# Altium PCB PCB1.PcbDoc
Units mm, origin at the board's own origin, x right, y up, seen from the top; angles counter-clockwise.
Board outline 137.5 x 101.6 mm, 2 copper layers (Top Layer, Bottom Layer); 20 components, 36 nets, 109 pads, 0 vias.
Unrouted connection lines stored in the file: 53.
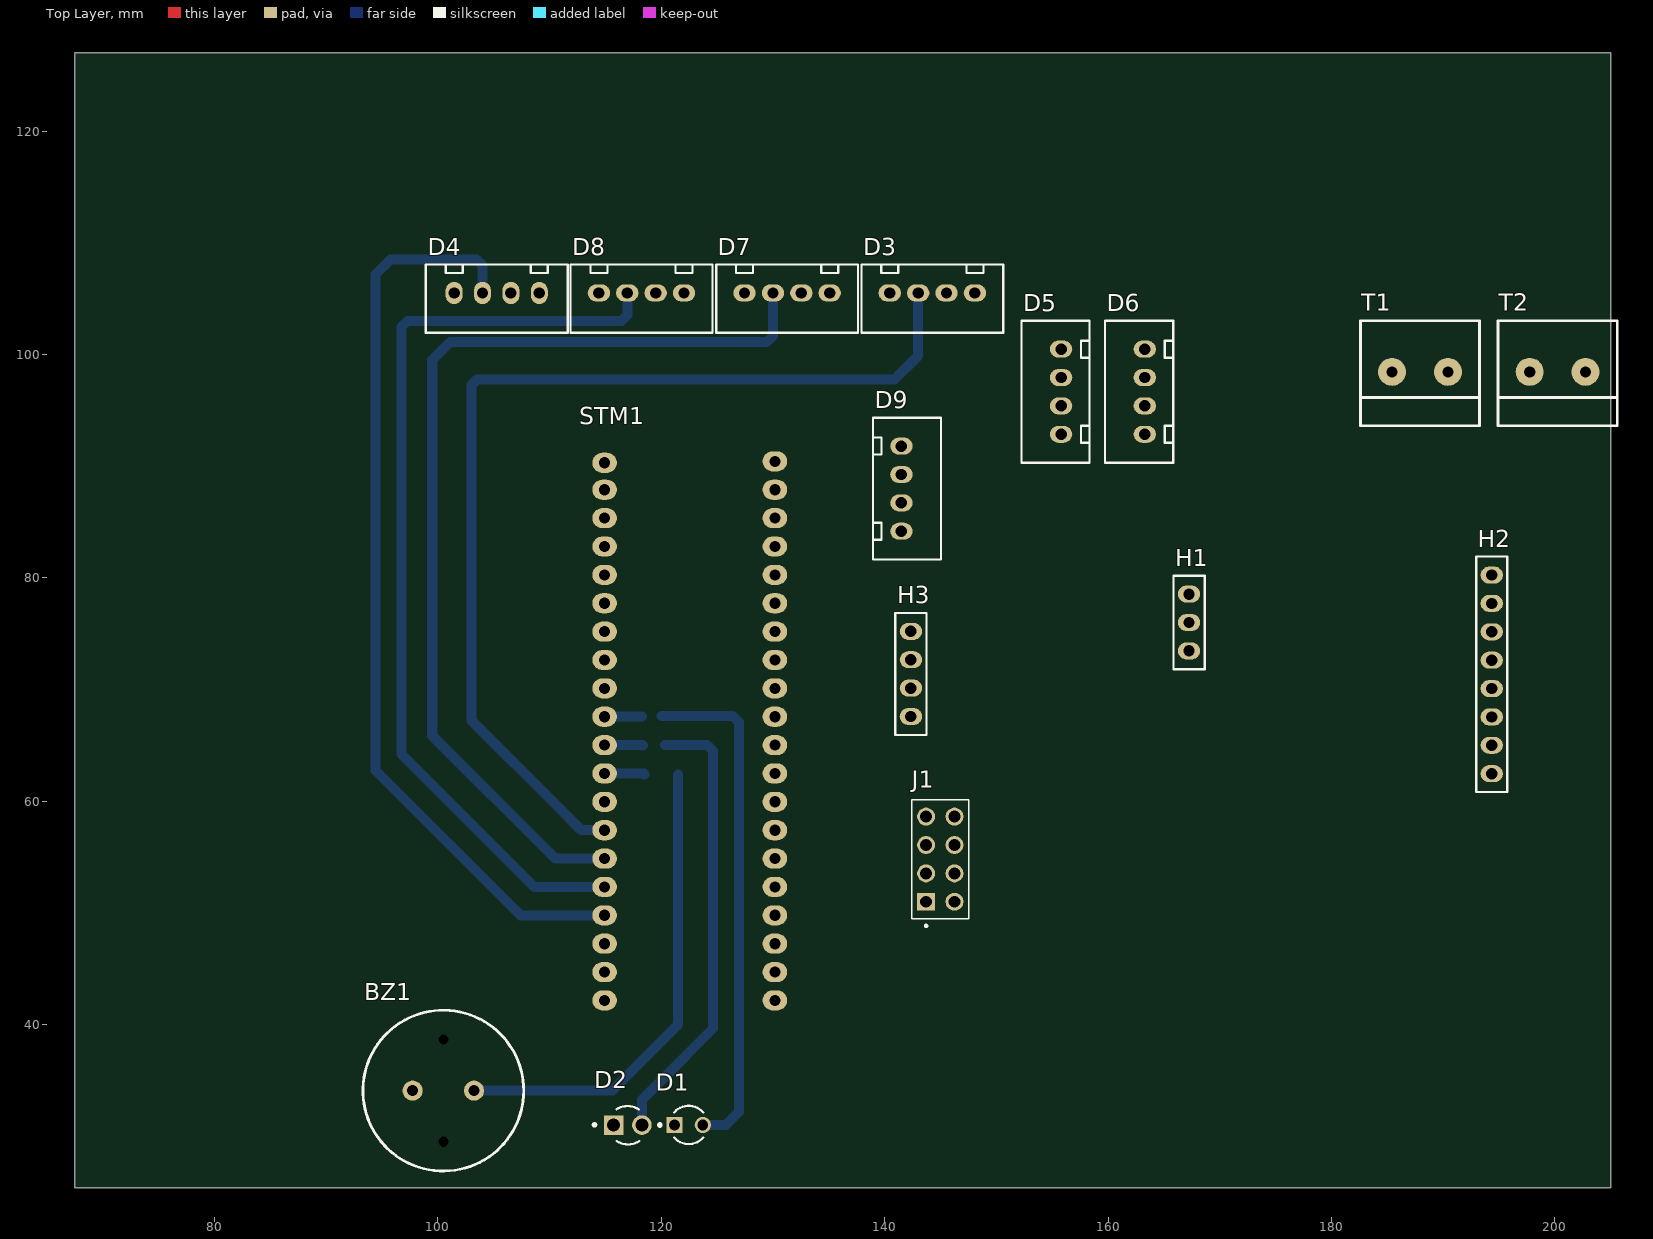
[diagram p0: Top Layer view]
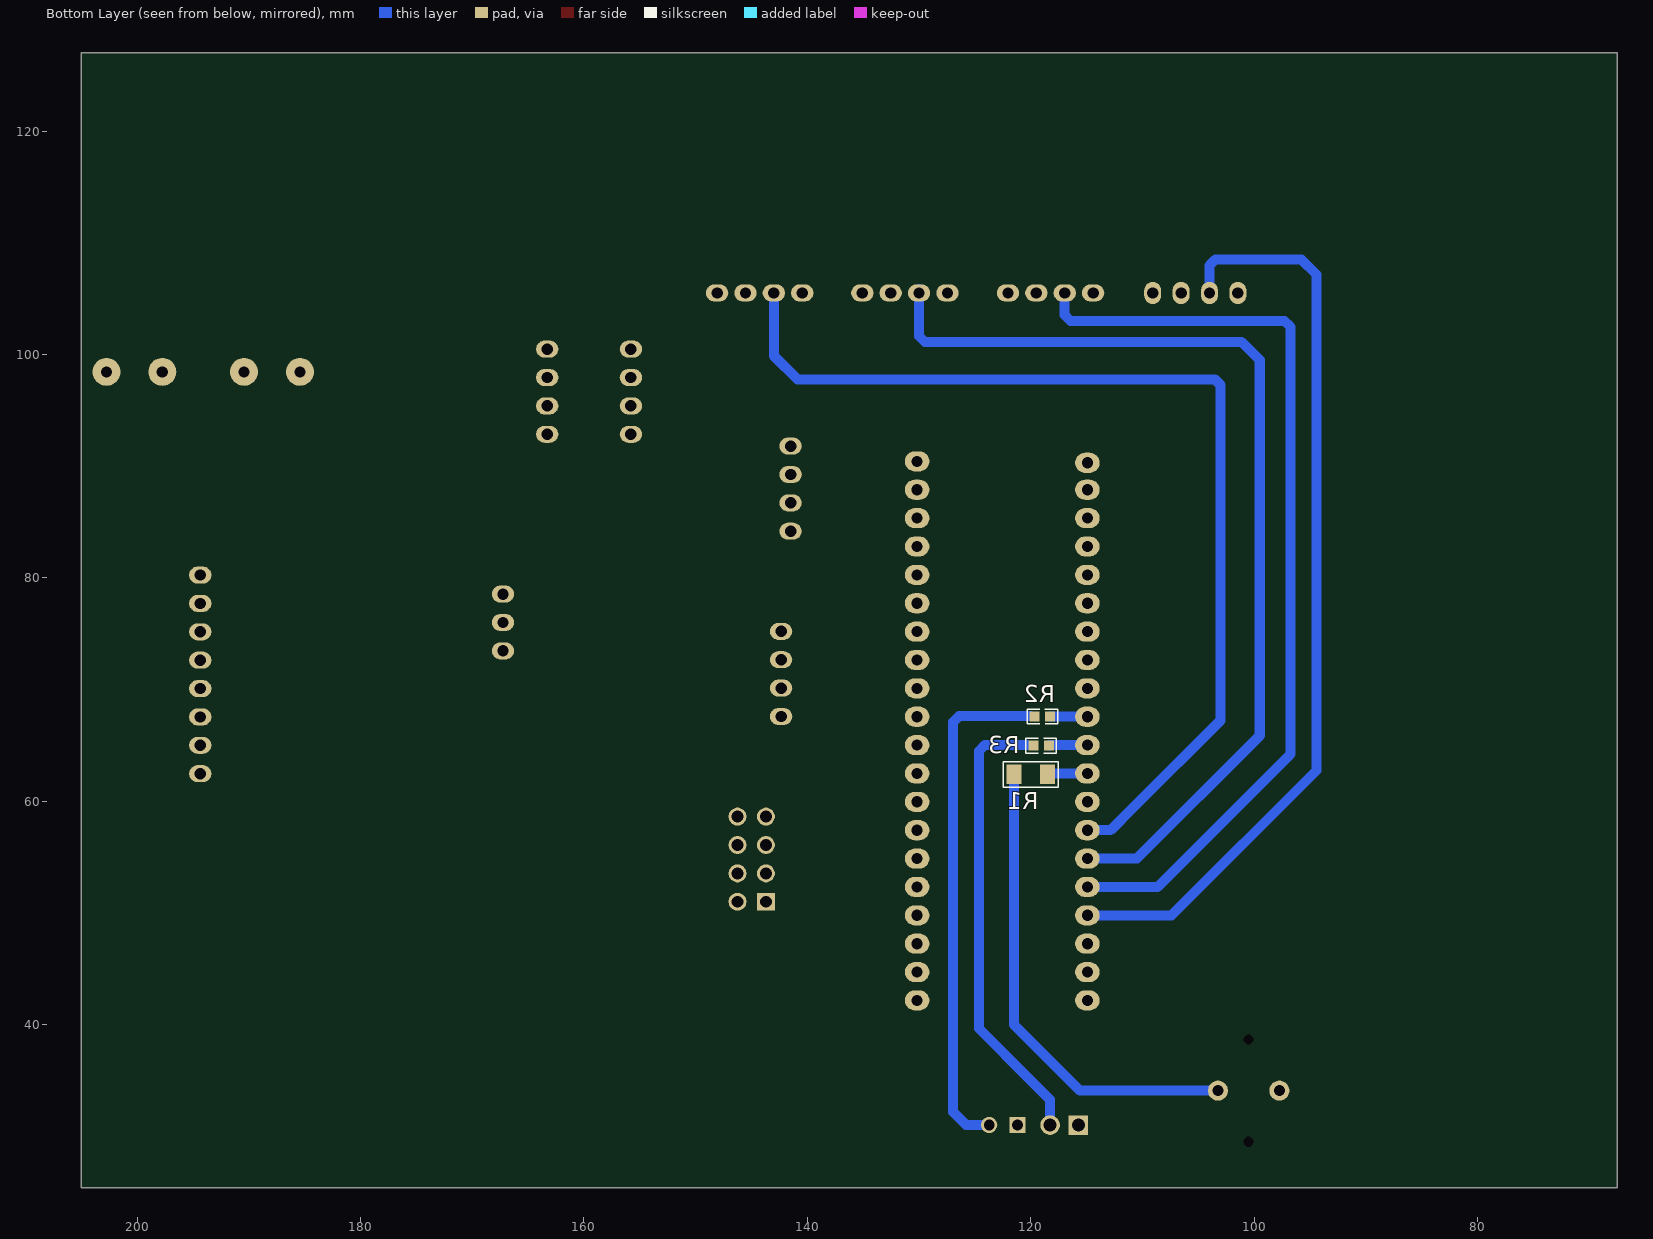
[diagram p1: Bottom Layer view, seen from below]

## Layer stack, top to bottom
Top Solder: solder mask 0.0102, Solder Resist, Dk 3.5
Top Layer: signal copper 0.0356
Dielectric 1: dielectric 0.32, FR-4, Dk 4.8
Bottom Layer: signal copper 0.0356
Bottom Solder: solder mask 0.0102, Solder Resist, Dk 3.5

## Board outline
67.5,25.4 205,25.4 205,127 67.5,127

## Design rules (kind name [scope] priority, off if disabled: settings)
Clearance stm [WithinRoom('clearence')] p1: gap=0.5 ignorepadtopadclearanceinfootprint=FALSE
Clearance Clearance_1 [All] p2: gap=1 ignorepadtopadclearanceinfootprint=FALSE
PolygonConnect [All] p1: connectstyle=Relief reliefconductorwidth=0.254 reliefentries=4 polygonreliefangle="90 Angle" airgapwidth=0.254
RoomDefinition clearence [False] p1: confinementstyle=ConfineIn formatcopy=TRUE lockcomponents=FALSE outline 98.166,109.75 151,109.75 151,101 98.166,101
RoomDefinition clearence [False] p2: confinementstyle=ConfineIn formatcopy=TRUE lockcomponents=FALSE outline 114.173,33.909 119.507,33.909 119.507,28.6 114.173,28.6
RoomDefinition clearence_1 [False] p3: confinementstyle=ConfineIn formatcopy=TRUE lockcomponents=FALSE outline 116.942,66.015 122.276,66.015 122.276,63.806 116.942,63.806
RoomDefinition clearence [False] p4: confinementstyle=ConfineIn formatcopy=TRUE lockcomponents=FALSE outline 135.052,95.225 110.795,95.225 110.795,35.052 135.052,35.052
RoomDefinition clearence [False] p5: confinementstyle=ConfineIn formatcopy=TRUE lockcomponents=FALSE outline 116.611,68.758 121.412,68.758 121.412,66.218 116.611,66.218
RoutingVias [All] p1: holewidth=0.711 width=1.27 viastyle="Through Hole" minholewidth=0.711 minwidth=1.27 maxholewidth=0.711 maxwidth=1.27
SolderMaskExpansion [All] p1: expansion=0.102 istentingtop=FALSE
Width [All] p1: maxlimit=1 minlimit=0.5 preferedwidth=0.9
30 further rules are at their usual default settings.

## Components (designator, comment, footprint, x,y, rotation, side; value= is the part's Value field where it differs from the comment)
BZ1 "PS1440P02BT" BUZZ_PS1440P02BT_TH 103.239,34.087 r180 top
D1 "Red" FP-HLMP-1301-MFG 122.453,31.013 r0 top
D2 "Green" FP-HLMP-1503-MFG 117,31 r0 top
D3 "Ultrasonic1" DATA_PIN_HEADER_4_2.54m#1 144.27,105.5 r180 top
D4 "Ultrasonic3" DATA_PIN_HEADER_4_2.54m#2 105.27,105.5 r180 top
D5 "Line Follower2" DATA_PIN_HEADER_4_2.54m#2 155.797,96.66 r90 top
D6 "Line Follower1" DATA_PIN_HEADER_4_2.54m#2 163.29,96.66 r90 top
D7 "Ultrasonic2" DATA_PIN_HEADER_4_2.54m#1 131.27,105.5 r180 top
D8 "Ultrasonic4" DATA_PIN_HEADER_4_2.54m#1 118.23,105.5 r180 top
D9 "Line Follower3" DATA_PIN_HEADER_4_2.54m#2 141.5,87.98 r270 top
H1 "IR" Female_Header_3 167.25,76 r90 top
H2 "TFT" Female_Header_8 194.35,71.355 r90 top
H3 "TFT2" Female_Header_4 142.35,71.395 r270 top
J1 "WIFI" SULLINS_PPPC042LFBN-RC 144.98,54.81 r270 top
R1 "100R" RES_1206 120.015,62.408 r180 bottom
R2 "330R" RES_0603 118.961,67.589 r0 bottom
R3 "330R" RES_0603 119.075,64.973 r0 bottom
STM1 "Stm32F401 small" STM32F401CCU6 122.174,67.691 r0 top
T1 "Terminal_block_2pins_5mm" Terminal_block_2pins_5mm 187.928,98.438 r0 top
T2 "Terminal_block_2pins_5mm" Terminal_block_2pins_5mm 200.247,98.438 r0 top

## Footprints (in the part's own frame and the unit in brackets; to place one, negate y for a bottom-side part, rotate by r counter-clockwise, add the part's x,y. Pads: shape width x height; smd on the part's side, far side on the other; paste and mask are expansions set on the pad)
BUZZ_PS1440P02BT_TH [mm] "AUDIO PIEZO TRANSDUCER 30V TH"
  round 1.8 hole 1 mask+0.076: 1(0,0) 2(5.5,0)
  round 0 hole 0.9: ""(2.75,4.572) ""(2.75,-4.572)
  silkscreen extent -4.45,-7.2 9.95,7.2, body extent -4.45,-7.2 9.95,7.2, height 9.55
DATA_PIN_HEADER_4_2.54m#1 [mil]
  oval 78.74x60 hole 40: 1(-150,0) 2(-50,0) 3(50,0) 4(150,0)
  silkscreen extent -250,-100 250,140, body extent -244,-94 244,133, height 276
DATA_PIN_HEADER_4_2.54m#2 [mil]
  oval 60x78.74 hole 40: 1(-150,0) 2(-50,0) 3(50,0) 4(150,0)
  silkscreen extent -250,-100 250,140, body extent -244,-94 244,133, height 276
Female_Header_3 [mil]
  oval 60x78.74 hole 40: 1(-100,0) 2(0,0) 3(100,0)
  silkscreen extent -165,-55 165,55, body extent -160,-50 160,50, height 336
Female_Header_4 [mil]
  oval 60x78.74 hole 40: 1(-150,0) 2(-50,0) 3(50,0) 4(150,0)
  silkscreen extent -215,-55 215,55, body extent -210,-50 210,50, height 336
Female_Header_8 [mil]
  oval 60x78.74 hole 40: 1(-350,0) 2(-250,0) 3(-150,0) 4(-50,0) 5(50,0) 6(150,0) 7(250,0) 8(350,0)
  silkscreen extent -415,-55 415,55, body extent -410,-50 410,50, height 336
FP-HLMP-1301-MFG [mm]
  rect 1.45x1.45 hole 0.95 paste-2539.97 mask+0: 1(-1.27,0)
  round 1.45 hole 0.95 paste-2539.97 mask+0: 2(1.27,0)
  silkscreen extent -2.7,-1.71 1.3,1.71, body extent -2.22,-2.22 2.22,2.22, height 0.25
FP-HLMP-1503-MFG [mm]
  rect 1.75x1.75 hole 1.15 paste-2539.97 mask+0: 1(-1.27,0)
  round 1.75 hole 1.15 paste-2539.97 mask+0: 2(1.27,0)
  silkscreen extent -3.1,-1.73 1.02,1.71, body extent -2.42,-2.42 2.42,2.42, height 0.25
RES_0603 [mil] "CASE: 0603"
  rect 35x35 smd mask+3: 1(-27.5,0) 2(27.5,0)
  silkscreen extent -53,-26 54,26, body extent -32,-16 31,16, height 18
RES_1206 [mm] "CASE: 1206"
  rect 1.35x1.75 smd: 1(1.5,0) 2(-1.5,0)
  silkscreen extent -2.44,-1.15 2.46,1.11, body extent -1.55,-0.77 1.55,0.78, height 0.55
STM32F401CCU6 [mm]
  oval 2.2x1.8 hole 1: 3V3(-7.239,-25.527) 3V3(8.001,17.653) 5V(-7.239,-20.447) 5V(8.001,22.733) GND(-7.239,-22.987) GND(8.001,20.193) PA0(8.001,-12.827) PA1(8.001,-10.287) PA2(8.001,-7.747) PA3(8.001,-5.207) PA4(8.001,-2.667) PA5(8.001,-0.127) PA6(8.001,2.413) PA7(8.001,4.953) PA8(-7.239,12.573) PA9(-7.239,10.033) PA10(-7.239,7.493) PA11(-7.239,4.953) PA12(-7.239,2.413) PA15(-7.239,-0.127) PB0(8.001,7.493) PB1(8.001,10.033) PB2(8.001,12.573) PB3(-7.239,-2.667) PB4(-7.239,-5.207) PB5(-7.239,-7.747) PB6(-7.239,-10.287) PB7(-7.239,-12.827) PB8(-7.239,-15.367) PB9(-7.239,-17.907) PB10(8.001,15.113) PB12(-7.239,22.606) PB13(-7.239,20.193) PB14(-7.239,17.653) PB15(-7.239,15.113) PC13(8.001,-22.987) PC14(8.001,-20.447) PC15(8.001,-17.907) RESET(8.001,-15.367) VBAT(8.001,-25.527)
  body extent -9.78,-31.37 10.54,25.27, height 13.16
SULLINS_PPPC042LFBN-RC [mm]
  rect 1.605x1.605 / inner round 1.605 / far side rect 1.605x1.605 hole 1.07: 1(3.81,-1.27)
  round 1.605 hole 1.07: 2(3.81,1.27) 3(1.27,-1.27) 4(1.27,1.27) 5(-1.27,-1.27) 6(-1.27,1.27) 7(-3.81,-1.27) 8(-3.81,1.27)
  silkscreen extent -5.33,-2.54 6.07,2.54, body extent -5.33,-2.54 5.33,2.54, height 8.51
Terminal_block_2pins_5mm [mm]
  round 2.5 hole 1: 1(-2.5,0) 2(2.5,0)
  silkscreen extent -5.33,-4.83 5.33,4.57, body extent -5.54,-4.57 5.03,4.43, height 13.61

## Part data
BZ1: library part BUZZ_PS1440P02BT-30V-TH, "Buzzers Transducer, Externally Driven Piezo 3V  4kHz 75dB @ 3V, 10cm Through Hole PC Pins", Alternate Part Number-1=NA, Case/Package=TH, Manufacturer="TDK Corporation", Manufacturer Part Number=PS1440P02BT, Supplier Part Number-1=NA, Supplier-1="SP ROAD"
D1: library part CMP-18399-000007-1, "LED RED DIFFUSED T-1 T/H", Forward Current=10mA, Forward Voltage=1.9V, Manufacturer=Broadcom, Manufacturer Part Number=HLMP-1301, Max Junction Temp=+110°C, Package=0, Reverse Voltage=5V, Temperature="-40°C to +100°C", Temperature Range High=+100°C, Temperature Range Low=-40°C, Automotive=No, Category=Diode, Colour=Red, ComponentLink2Description=Datasheet, ComponentLink2URL=https://docs.broadcom.com/docs/AV02-1555EN, Device Class L1=Optoelectronics, Device Class L2=LEDs, Device Class L3=unset, Digikey Description="LED RED DIFFUSED T-1 T/H", Lead Free=Yes, Led Orientation=Straight, Luminous Intensity=3.4mcd, Mouser Description="Standard LEDs - Through Hole Red Diffused 635nm 3.4mcd", Octopart=https://octopart.com/hlmp-1301-broadcom-71130345, Peak Emmision Wavelength=635nm, RoHS=TRUE, Viewing Angle=60°, Wavelength=626nm
D2: library part CMP-18399-000010-1, "LED GREEN DIFFUSED T-1 T/H", Forward Current=10mA, Forward Voltage=2.1V, Manufacturer=Broadcom, Manufacturer Part Number=HLMP-1503, Max Junction Temp=+110°C, Reverse Voltage=5V, Temperature="-20°C to +100°C", Temperature Range High=+100°C, Temperature Range Low=-20°C, Automotive=No, Category=Diode, Colour=Green, ComponentLink2Description=Datasheet, ComponentLink2URL=https://docs.broadcom.com/docs/AV02-1555EN, Device Class L1=Optoelectronics, Device Class L2=LEDs, Device Class L3=unset, Digikey Description="LED GREEN DIFFUSED T-1 T/H", Height=6.35mm, Lead Free=Yes, Led Orientation=Straight, Luminous Intensity=1mcd, Mouser Description="LED; Green; 1mcd; 0.115In.Dia.; T-1; 565nm; 25mA; 2.1V; 5V; GaP; -20degC; 100deg", Octopart=https://octopart.com/hlmp-1503-broadcom-71130371, Package=HLMP-1503, Peak Emmision Wavelength=565nm, RoHS=TRUE, Standoff Height=0.88mm, Viewing Angle=60°, Wavelength=569nm
D3 D4 D5 D6 D7 D8 D9: library part DATA_PIN_HEADER_4_2.54m
H1: library part FEMALE_HEADER_3
H2: library part FEMALE_HEADER_8
H3: library part FEMALE_HEADER_4
J1: library part PPPC042LFBN-RC, "8 Position Total Dual Row 2.54 mm Pitch Straight Female Header", Package=None, Check_prices=https://www.snapeda.com/parts/PPPC042LFBNRC/Sullins/view-part/?ref=eda, MF="Sullins Connector Solutions", MP=PPPC042LFBNRC, SnapEDA_Link=https://www.snapeda.com/parts/PPPC042LFBNRC/Sullins/view-part/?ref=snap
R1: library part RES_10R-0.25W-5%-1206, "10 Ohms ±5% 0.25W, 1/4W Chip Resistor 1206 (3216 Metric) Automotive AEC-Q200 Thick Film", Alternate Part Number-1=NA, Case/Package=1206, Manufacturer=Yageo, Manufacturer Part Number=RMCF1206JT10R0, Supplier Part Number-1=WR12X10R0FTL, Supplier-1=SIRICOM
R2 R3: library part RES_2.2K-0.1W-1%-0603, "2.2 kOhms ±1% 0.1W, 1/10W Chip Resistor 0603 (1608 Metric) Automotive AEC-Q200 Thick Film", Alternate Part Number-1=WR06X2201FTL, Case/Package=0603, Manufacturer=Walsin, Manufacturer Part Number=WR06X2201FTL, Supplier Part Number-1=WR06X2201FTL, Supplier-1=SIRICOM

## Nets (pads, with @x,y where several pads share a name; then routed paths per layer and width w, separated by ;. In a path a pad name is that pad's centre, name@x,y a point inside that pad or via, vN(x,y) a via of type N, cw(c..) or ccw(c..) an arc to the next point about the centre after c; other vN are vias at no path point)
+3V3: D5.1 D6.1 D9.1 H1.1 H2.1 H2.8 J1.1 STM1.3V3 T2.1
+5: D3.1 D4.1 D7.1 D8.1 T1.1
+5V: STM1.5V
Buzzer: R1.1 STM1.PB4 | length 3.6
  Bottom Layer w0.9: STM1.PB4 118.439,62.484 R1.1
GND: BZ1.2 D1.1 D2.1 D3.4 D4.4 D5.2 D6.2 D7.4 D8.4 D9.2 H1.2 H2.2 H2.3 J1.8 STM1.GND T1.2 T2.2
GREEN_LED: R3.1 STM1.PB3 | length 3.5
  Bottom Layer w0.9: STM1.PB3 118.326,65.024 R3.1
IR1_A0: D6.4 STM1.PA0
IR1_D0: D6.3 STM1.PB10
IR2_A0: D5.4 STM1.PA1
IR2_D0: D5.3 STM1.PB2
IR3_A0: D9.4 STM1.PB0
IR3_D0: D9.3 STM1.PB1
IR_OUT: H1.3 STM1.PA12
NetBZ1_1: BZ1.1 R1.2 | length 43.1
  Bottom Layer w0.9: BZ1.1 115.595,34.087 116.561,35.052 121.515,40.006 R1.2
NetD1_2: D1.2 R2.2 | length 45.8
  Bottom Layer w0.9: R2.2@120.027,67.615 121.412,67.615 126.422,67.615 126.949,67.088 126.949,35.052 126.949,32.182 125.781,31.013 D1.2
NetD2_2: D2.2 R3.2 | length 40.6
  Bottom Layer w0.9: D2.2 118.27,33.282 118.897,33.909 120.04,35.052 124.638,39.649 124.638,64.497 124.111,65.024 120.345,65.024
RED_LED: R2.1 STM1.PA15 | length 3.3
  Bottom Layer w0.9: STM1.PA15 118.237,67.564 R2.1
SD_CLK: H3.4 STM1.PA5
SD_CS: H3.1 STM1.PA4
SD_MISO: H3.3 STM1.PA6
SD_MOSI: H3.2 STM1.PA7
TFT_A0: H2.5 STM1.PB14
TFT_CLK: H2.7 STM1.PB13
TFT_RST: H2.4 STM1.PB12
TFT_SDA: H2.6 STM1.PB15
US1_ECHO: D3.3 STM1.PB6 | length 92.7
  Bottom Layer w0.9: STM1.PB6 112.846,57.404 110.795,59.455 103,67.25 103,97.237 103.527,97.765 140.89,97.765 143,99.875 D3.3
US1_TRIG: D3.2 STM1.PA8
US2_ECHO: D7.3 STM1.PB7 | length 89.2
  Bottom Layer w0.9: STM1.PB7 110.5,54.864 99.5,65.864 99.5,99.5 101.117,101.117 129.473,101.117 130,101.645 D7.3@130,105.855
US2_TRIG: D7.2 STM1.PA9
US3_ECHO: D4.3 STM1.PB9 | length 83.1
  Bottom Layer w0.9: D4.3@104,105.527 104,107.973 103.473,108.5 98.166,108.5 95.777,108.5 94.426,107.149 94.426,62.749 107.391,49.784 110.5,49.784 STM1.PB9
US3_TRIG: D4.2 STM1.PA10
US4_ECHO: D8.3 STM1.PB8 | length 84
  Bottom Layer w0.9: STM1.PB8 108.636,52.324 96.75,64.21 96.75,102.473 97.277,103 98.166,103 116.433,103 116.96,103.527 D8.3
US4_TRIG: D8.2 STM1.PA11
WFI_CH_PD: J1.5 STM1.PB5
WIFI_RXD: J1.2 STM1.PA2
WIFI_TXD: J1.7 STM1.PA3
pads on no net: BZ1. J1.3 J1.4 J1.6 STM1.PC13 STM1.PC14 STM1.PC15 STM1.RESET STM1.VBAT